# Altium PCB Daemi.PcbDoc (part 1 of 2)
Units mm, origin at the board's own origin, x right, y up, seen from the top; angles counter-clockwise.
Board outline 85 x 85 mm, 2 copper layers (Top Layer, Bottom Layer); 151 components, 56 nets, 527 pads, 120 vias.
Unrouted connection lines stored in the file: 9.
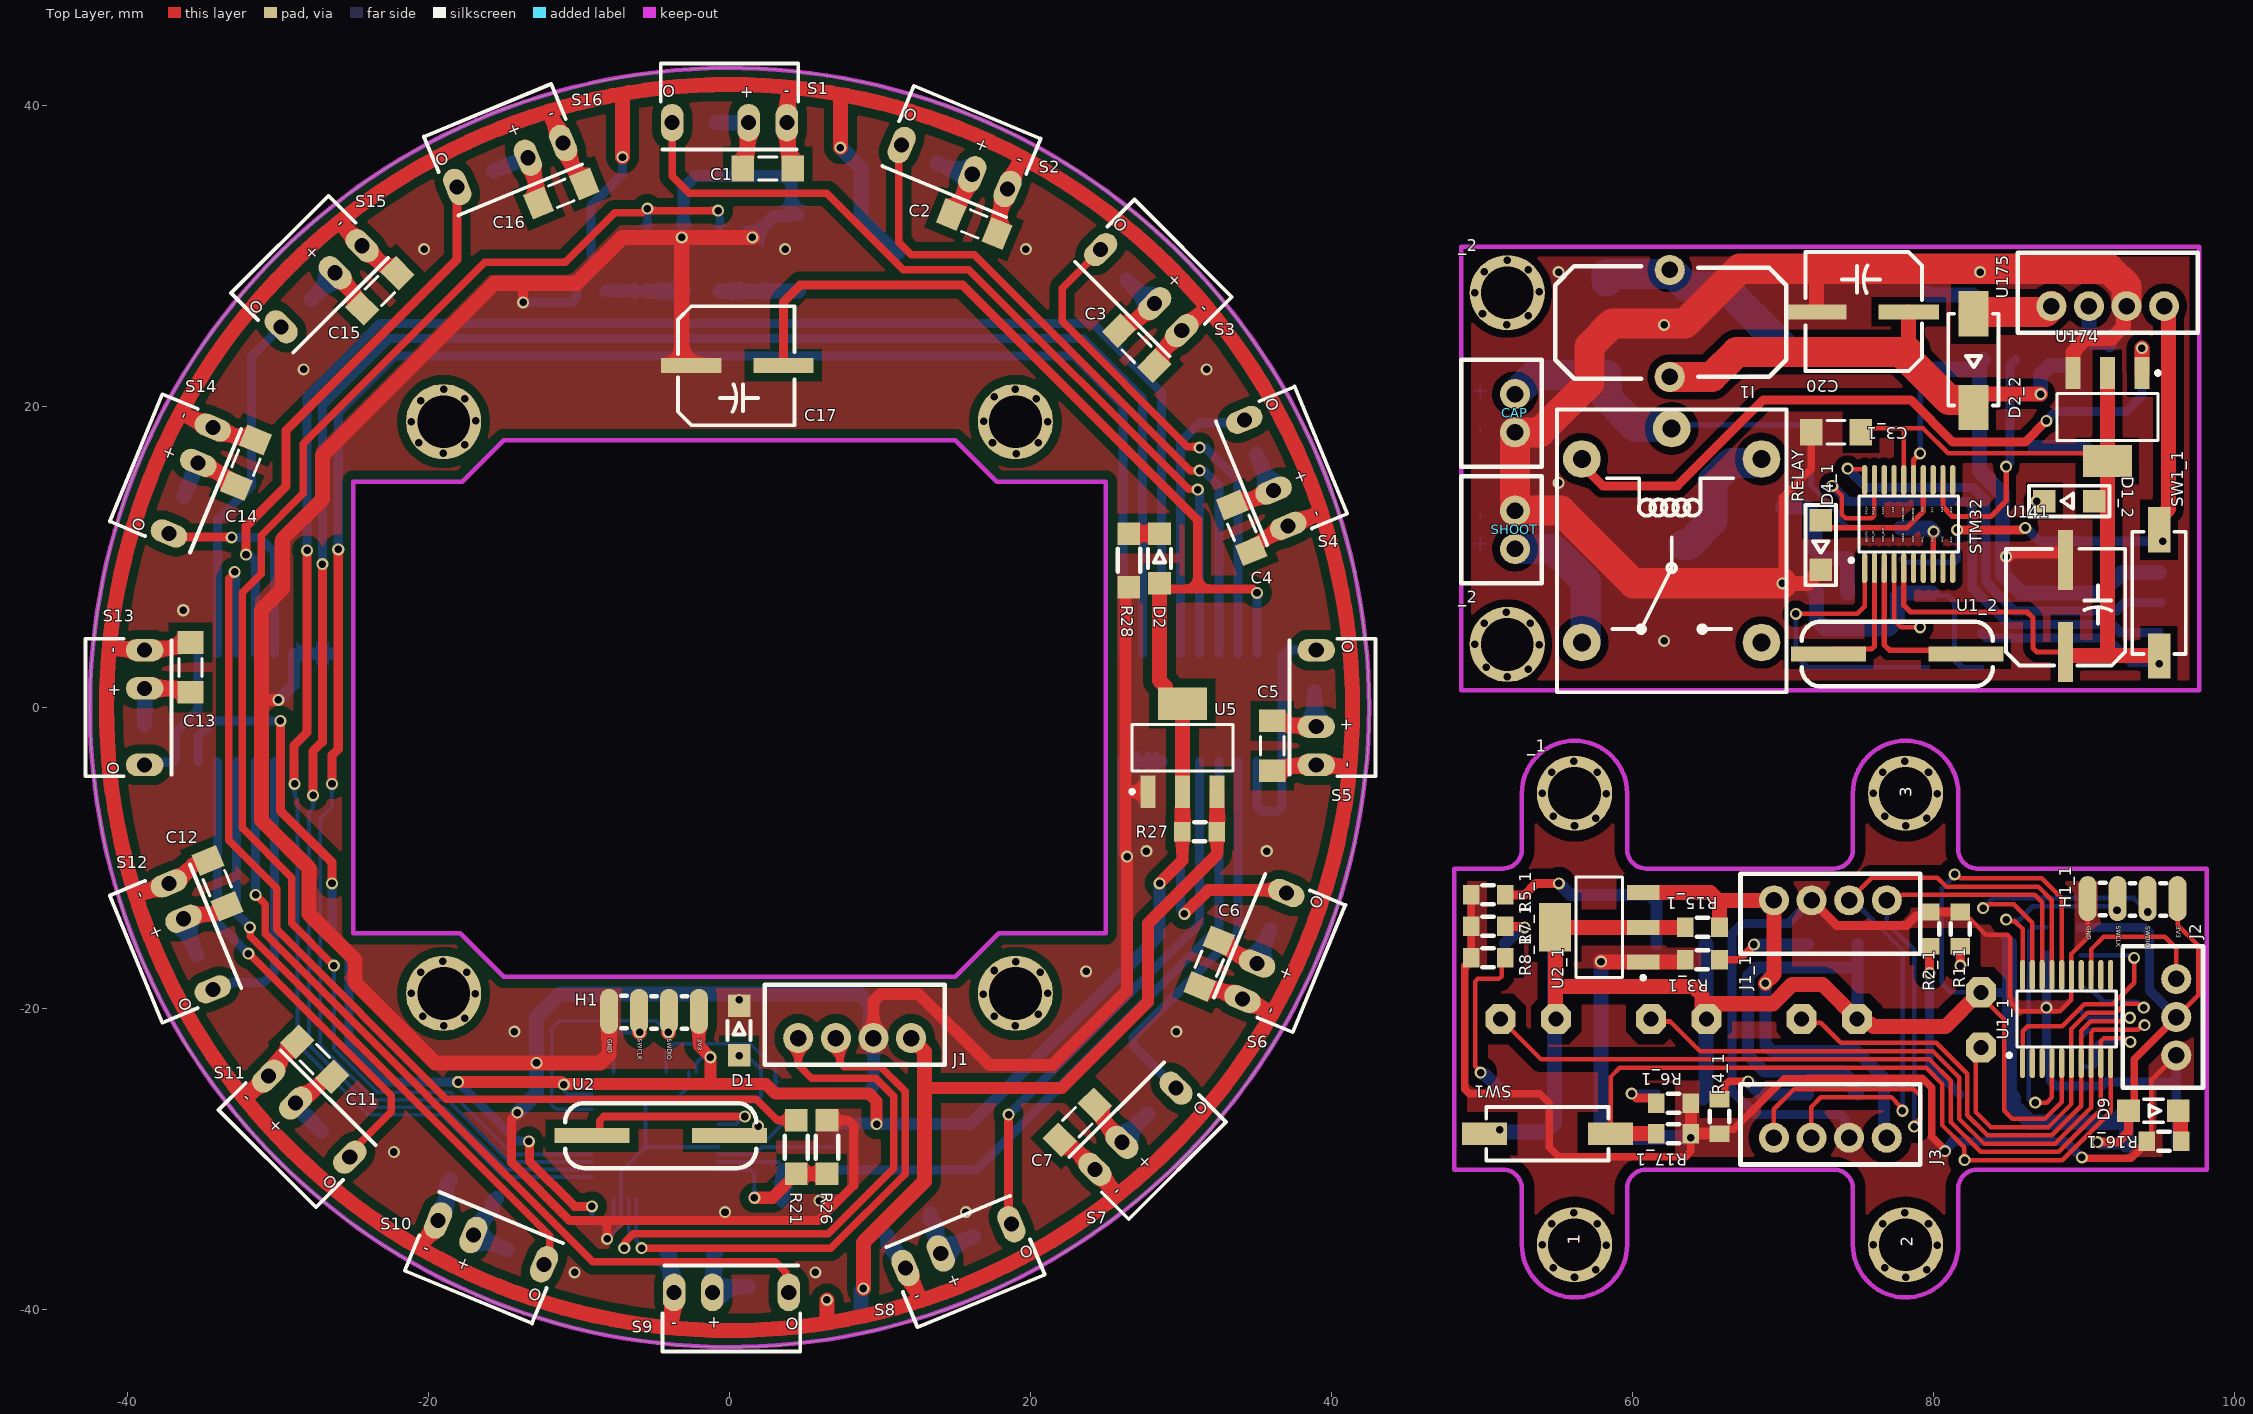
[diagram p0: Top Layer view]
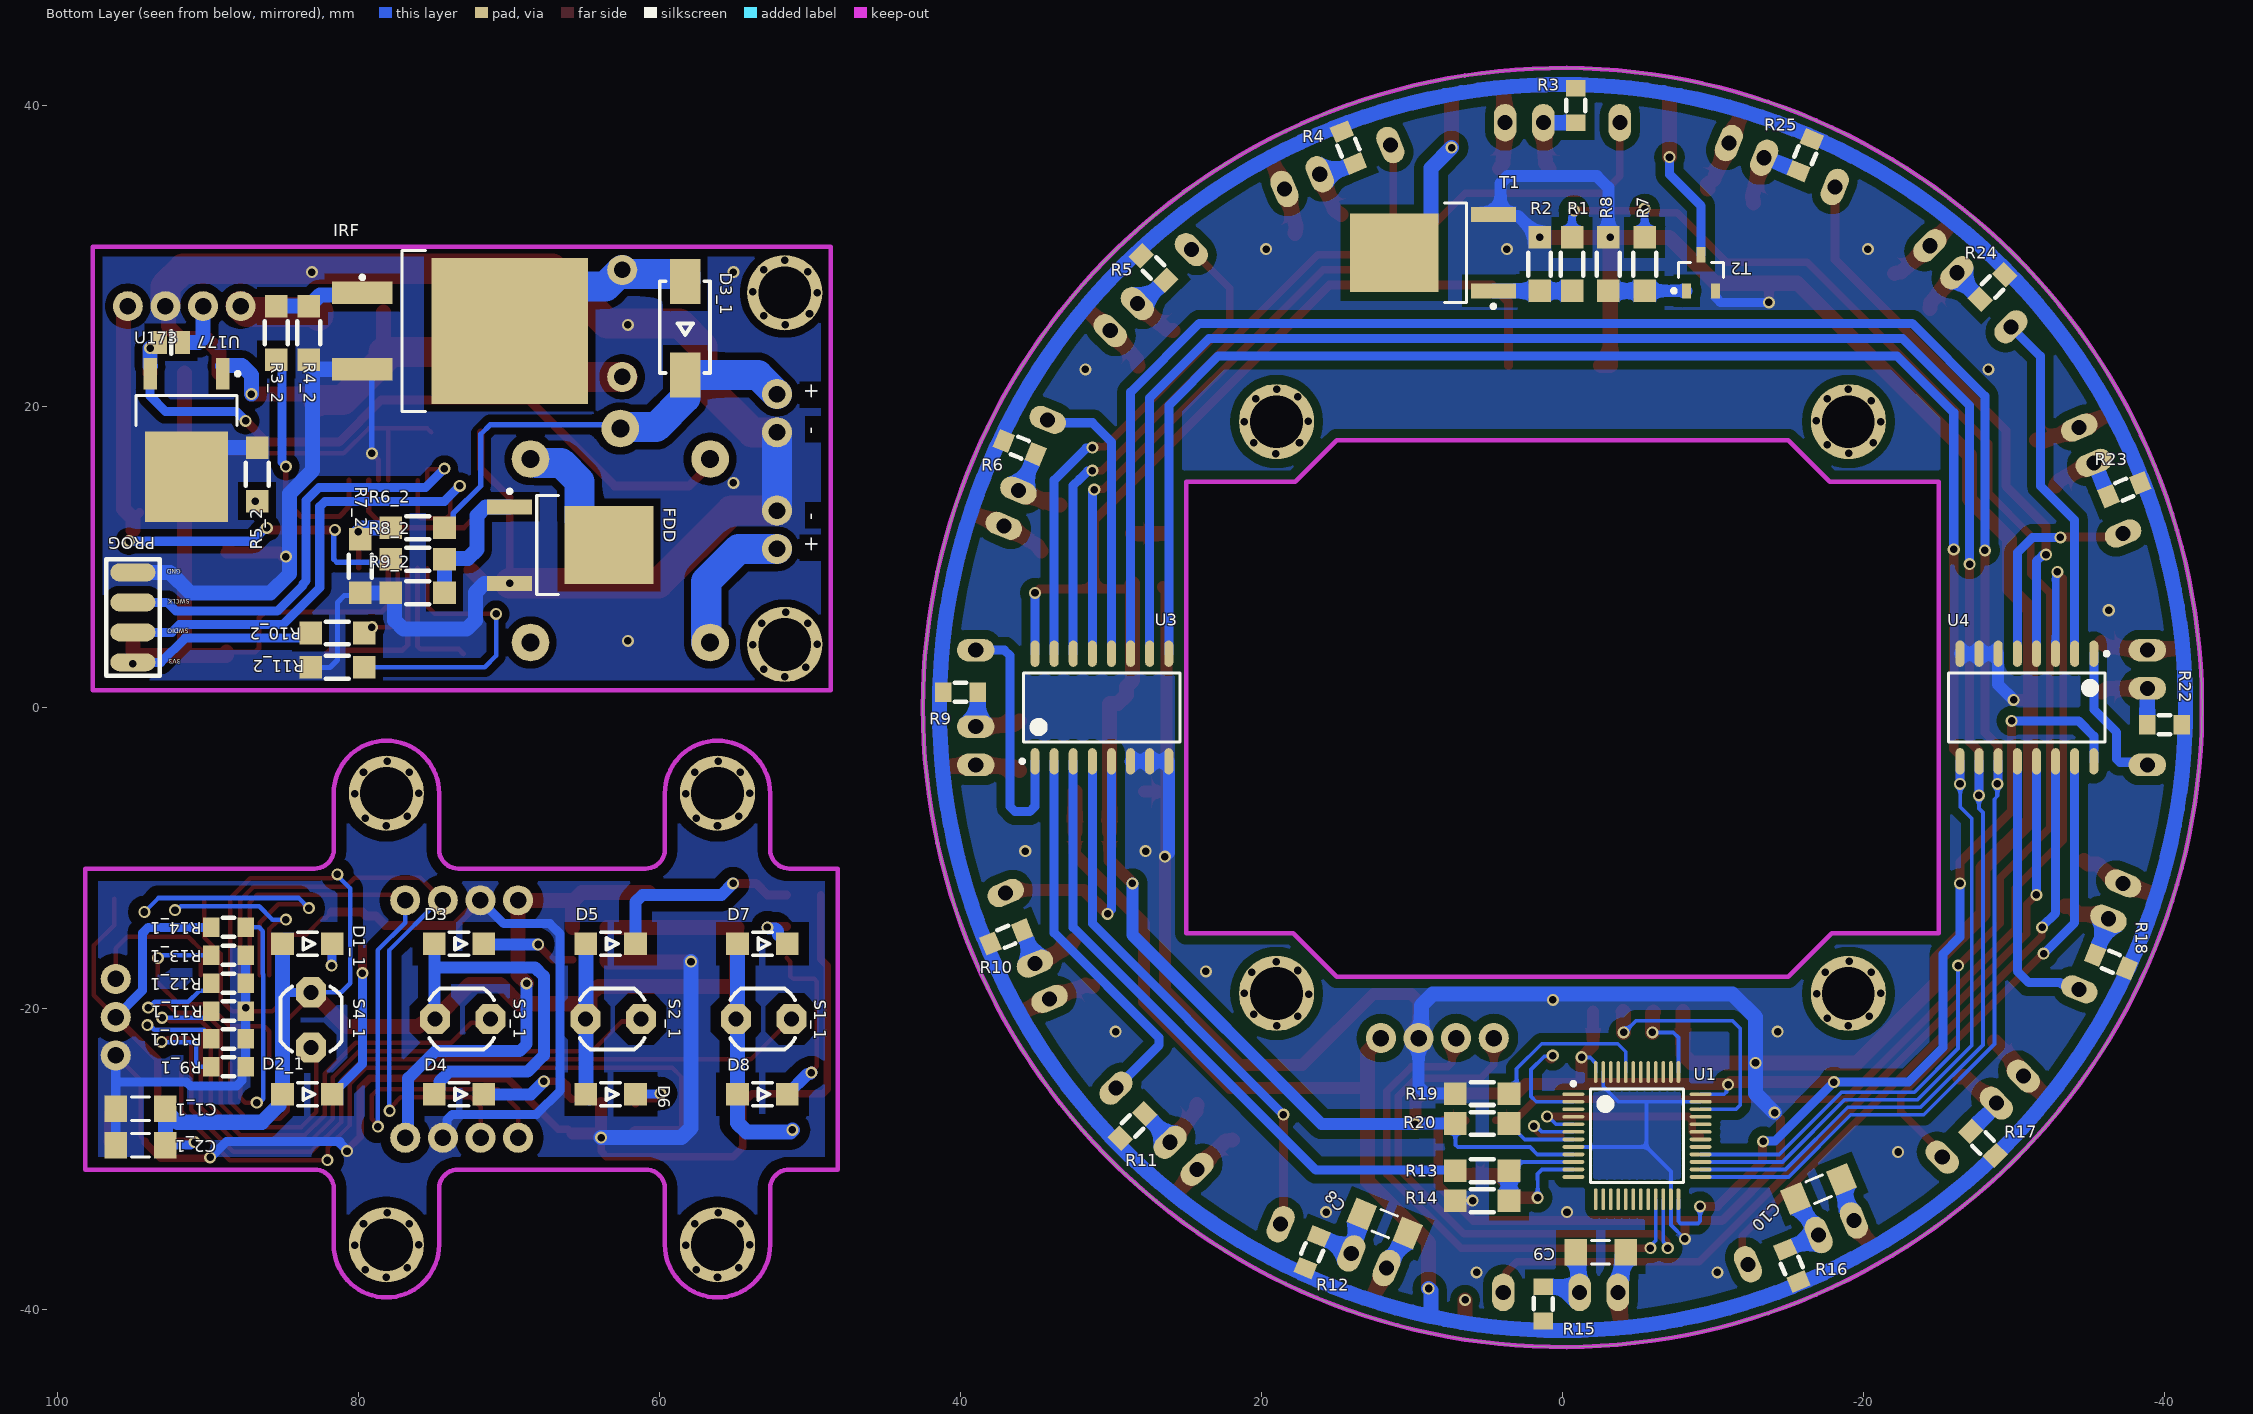
[diagram p1: Bottom Layer view, seen from below]

## Layer stack, top to bottom
Top Solder: solder mask 0.0102, Solder Resist, Dk 3.5
Top Layer: signal copper 0.0356
Dielectric 1: dielectric 0.32, FR-4, Dk 4.8
Bottom Layer: signal copper 0.0356
Bottom Solder: solder mask 0.0102, Solder Resist, Dk 3.5

## Board outline
-42.5,0 ccw(c0,0) 0,-42.5 ccw(c0,0) 42.5,0 ccw(c0,0) 0,42.5 ccw(c0,0)
cut-out: -25,-15 -25,15 -17.766,15 -15,17.766 15,17.766 17.766,15 25,15 25,-15 17.893,-15 15,-17.893 -15,-17.893 -17.893,-15

## Design rules (kind name [scope] priority, off if disabled: settings)
Clearance [All] p1: gap=0.6 ignorepadtopadclearanceinfootprint=FALSE except(0: Arc-Hole Track-Hole SMDPad-Hole THPad-Hole Via-Hole Fill-Hole Poly-Hole Region-Hole Text-Hole; 0.25: Arc-Arc Arc-Track Arc-SMDPad Arc-Via Track-Track Track-SMDPad Track-Via SMDPad-SMDPad SMDPad-Via THPad-Via Via-Via; 0.254: Arc-THPad Arc-Text Track-THPad Track-Text SMDPad-THPad SMDPad-Text THPad-THPad THPad-Text Via-Text Fill-Text Poly-Text Region-Text Text-Text)
PlaneConnect [All] p1: planeconnectstyle=Direct reliefexpansion=0.508 reliefentries=4 reliefconductorwidth=0.254 reliefairgap=0.254
PolygonConnect [All] p1: connectstyle=Direct reliefconductorwidth=0.254 reliefentries=4 polygonreliefangle="90 Angle" airgapwidth=0.254
RoutingVias [All] p1: holewidth=0.5 width=0.8 viastyle="Through Hole" minholewidth=0.5 minwidth=0.8 maxholewidth=0.6 maxwidth=1
SolderMaskExpansion [All] p1: expansion=0.102 istentingtop=FALSE
Width [All] p1: maxlimit=10 minlimit=0.25 preferedwidth=0.3
29 further rules are at their usual default settings.

## Classes and differential pairs
component class HS0038_BOARD: C1 C2 C3 C4 C5 C6 C7 C8 C9 C10 C11 C12 C13 C14 C15 C16 C17 D1 D2 H1 J1 R1 R2 R3 R4 R5 R6 R7 R8 R9 R10 R11 R12 R13 R14 R15 R16 R17 R18 R19 R20 R21 R22 R23 R24 R25 R26 R27 R28 S1 S2 S3 S4 S5 S6 S7 S8 S9 S10 S11 S12 S13 S14 S15 S16 T1 T2 U1 U2 U3 U4 U5

## Components (designator, comment, footprint, x,y, rotation, side; value= is the part's Value field where it differs from the comment)
1 "Comment" SCREW 56.152,-35.701 r90 top locked
2 "Comment" SCREW 78.152,-35.701 r90 top
3 "Comment" SCREW 78.152,-5.701 r90 top
_1 "Comment" SCREW 56.152,-5.701 r90 top locked
_2 "Comment" SCREW 51.689,4.191 r90 top
_2 "Comment" SCREW 51.689,27.559 r0 top
C1 "CAP" CAP1206 2.54,35.814 r0 top
C1_1 "CAP" CAP1206 94.488,-26.67 r180 bottom (schematic designator C1)
C2 "CAP" CAP1206 16.257,32.134 r337.5 top
C2_1 "CAP" CAP1206 94.488,-29.083 r180 bottom (schematic designator C2)
C3 "CAP" CAP1206 27.051,23.876 r315 top
C3_1 "Comment" CAP1206 73.533,18.288 r180 top
C4 "CAP" CAP1206 34.036,11.938 r292.5 top
C5 "CAP" CAP1206 36.068,-2.54 r270 top
C6 "CAP" CAP1206 31.877,-17.018 r247.5 top
C7 "CAP" CAP1206 23.114,-27.559 r225 top
C8 "CAP" CAP1206 11.811,-34.29 r202.5 bottom
C9 "CAP" CAP1206 -2.54,-36.195 r180 bottom
C10 "CAP" CAP1206 -17.018,-32.004 r157.5 bottom
C11 "CAP" CAP1206 -27.559,-23.368 r135 top
C12 "CAP" CAP1206 -34.033,-11.683 r112.5 top
C13 "CAP" CAP1206 -35.814,2.667 r90 top
C14 "CAP" CAP1206 -32.131,16.256 r67.5 top
C15 "CAP" CAP1206 -23.241,27.686 r45 top
C16 "CAP" CAP1206 -11.177,34.166 r22.5 top
C17 "CAP" "CAP SMD 100uF 16V" 0.508,22.733 r0 top
C20 "Comment" "CAP SMD 100uF 16V" 75.311,26.289 r180 top
CAP "Comment" "XH 2pin" 51.308,19.558 r90 top
D1 "LED" "LED GREEN 1206" 0.635,-21.463 r90 top
D1_1 "LED" "LED RED 1206" 83.406,-15.701 r180 bottom locked (schematic designator D1)
D1_2 "Comment" "LED BLUE 1206" 89.027,13.716 r180 top
D2 "LED" "LED GREEN 1206" 28.575,9.906 r90 top
D2_1 "LED" "LED RED 1206" 83.406,-25.701 r180 bottom locked (schematic designator D2)
D2_2 "Comment" Diode 82.677,23.114 r270 top
D3 "LED" "LED RED 1206" 73.328,-15.701 r180 bottom locked
D3_1 "Comment" Diode 58.293,25.273 r270 bottom
D4 "LED" "LED RED 1206" 73.328,-25.701 r180 bottom locked
D4_1 "Comment" "LED BLUE 1206" 72.517,10.795 r270 top
D5 "LED" "LED RED 1206" 63.249,-15.701 r180 bottom locked
D6 "LED" "LED RED 1206" 63.249,-25.701 r180 bottom locked
D7 "LED" "LED RED 1206" 53.171,-15.701 r180 bottom locked
D8 "LED" "LED RED 1206" 53.171,-25.701 r180 bottom locked
D9 "LED" "LED GREEN 1206" 94.615,-26.797 r0 top
FDD "Comment" FDD6690A 65.913,10.795 r180 bottom
H1 "PROG" PROGRAMER -5.08,-20.193 r180 top
H1_1 "PROG" PROGRAMER 93.176,-12.7 r180 top (schematic designator H1)
I1 "Comment" inductor 62.357,25.527 r90 top
IRF "Comment" IRF540S 73.106,25.019 r180 bottom
J1 "XH4" "XH 4PIN" 8.318,-21.082 r0 top
J1_1 "XH4" "XH 4PIN" 73.152,-13.701 r180 top locked (schematic designator J1)
J2 "XH3" "XH 3PIN" 95.25,-20.574 r90 top
J3 "XH4" "XH 4PIN" 73.152,-27.701 r0 top locked
PROG "Comment" PROGRAMER 94.996,6.054 r90 bottom
R1 "RES" RES1206 -0.635,29.464 r90 bottom
R1_1 "RES" RES805 81.788,-14.732 r270 top (schematic designator R1)
R2 "RES" RES1206 1.524,29.464 r90 bottom
R2_1 "RES" RES805 79.756,-14.732 r270 top (schematic designator R2)
R3 "RES" RES805 -0.889,40.005 r90 bottom
R3_1 "RES" RES805 64.643,-16.764 r0 top (schematic designator R3)
R3_2 "Comment" RES1206 85.471,24.892 r270 bottom
R4 "RES" RES805 14.224,37.211 r67.5 bottom
R4_1 "RES" RES805 65.786,-27.178 r90 top (schematic designator R4)
R4_2 "Comment" RES1206 83.315,24.892 r270 bottom
R5 "RES" RES805 27.178,29.21 r45 bottom
R5_1 "RES" RES805 50.419,-12.446 r0 top (schematic designator R5)
R5_2 "Comment" RES1206 86.741,15.494 r90 bottom
R6 "RES" RES805 36.068,17.272 r22.5 bottom
R6_1 "RES" RES805 62.738,-26.289 r180 top (schematic designator R6)
R6_2 "Comment" RES1206 76.073,11.938 r180 bottom
R7 "RES" RES1206 -5.461,29.464 r90 bottom
R7_1 "RES" RES805 50.419,-14.541 r0 top (schematic designator R7)
R7_2 "Comment" RES1206 79.883,9.398 r270 bottom
R8 "RES" RES1206 -3.048,29.464 r90 bottom
R8_1 "RES" RES805 50.419,-16.637 r0 top (schematic designator R8)
R8_2 "Comment" RES1206 76.073,9.865 r0 bottom
R9 "RES" RES805 40.005,1.016 r0 bottom
R9_1 "RES" RES805 88.646,-23.88 r0 bottom (schematic designator R9)
R9_2 "Comment" RES1206 76.073,7.62 r0 bottom
R10 "RES" RES805 36.957,-15.24 r337.5 bottom
R10_1 "RES" RES805 88.646,-22.025 r0 bottom (schematic designator R10)
R10_2 "Comment" RES1206 81.407,4.953 r0 bottom
R11 "RES" RES805 28.575,-27.813 r315 bottom
R11_1 "RES" RES805 88.646,-20.17 r0 bottom (schematic designator R11)
R11_2 "Comment" RES1206 81.407,2.666 r0 bottom
R12 "RES" RES805 16.637,-36.195 r292.5 bottom
R12_1 "RES" RES805 88.646,-18.315 r0 bottom (schematic designator R12)
R13 "RES" RES1206 5.334,-30.774 r0 bottom
R13_1 "RES" RES805 88.646,-16.46 r0 bottom (schematic designator R13)
R14 "RES" RES1206 5.334,-32.766 r180 bottom
R14_1 "RES" RES805 88.646,-14.605 r180 bottom (schematic designator R14)
R15 "RES" RES805 1.27,-39.624 r270 bottom
R15_1 "RES" RES805 64.643,-14.605 r180 top (schematic designator R15)
R16 "RES" RES805 -15.24,-37.084 r247.5 bottom
R16_1 "RES" RES805 95.323,-28.829 r0 top (schematic designator R16)
R17 "RES" RES805 -27.94,-28.956 r225 bottom
R17_1 "RES" RES805 62.738,-28.321 r180 top (schematic designator R17)
R18 "RES" RES805 -36.449,-16.891 r202.5 bottom
R19 "RES" RES1206 5.334,-25.654 r180 bottom
R20 "RES" RES1206 5.334,-27.644 r180 bottom
R21 "RES" RES1206 4.445,-29.21 r90 top
R22 "RES" RES805 -40.005,-1.143 r180 bottom
R23 "RES" RES805 -37.338,14.478 r157.5 bottom
R24 "RES" RES805 -28.575,27.94 r135 bottom
R25 "RES" RES805 -16.129,36.703 r112.5 bottom
R26 "RES" RES1206 6.477,-29.21 r270 top
R27 "RES" RES805 31.242,-8.255 r180 top
R28 "RES" RES1206 26.543,9.779 r270 top
RELAY "Comment" "Relay 5V 10A" 62.611,10.414 r90 top
S1 "TSOP1738" TSOP1738 0,38.608 r180 top
S1_1 "LDR" LDR 53.152,-20.701 r180 bottom locked (schematic designator S1)
S2 "TSOP1738" TSOP1738 14.859,35.687 r157.5 top
S2_1 "LDR" LDR 63.152,-20.701 r180 bottom locked (schematic designator S2)
S3 "TSOP1738" TSOP1738 27.178,27.559 r135 top
S3_1 "LDR" LDR 73.152,-20.701 r180 bottom (schematic designator S3)
S4 "TSOP1738" TSOP1738 35.433,15.494 r112.5 top
S4_1 "LDR" LDR 83.152,-20.701 r270 bottom locked (schematic designator S4)
S5 "TSOP1738" TSOP1738 38.735,0 r90 top
S6 "TSOP1738" TSOP1738 35.306,-15.748 r67.5 top
S7 "TSOP1738" TSOP1738 26.797,-27.813 r45 top
S8 "TSOP1738" TSOP1738 15.113,-35.56 r22.5 top
S9 "TSOP1738" TSOP1738 0.127,-38.608 r0 top
S10 "TSOP1738" TSOP1738 -15.748,-35.306 r337.5 top
S11 "TSOP1738" TSOP1738 -27.751,-27.007 r315 top
S12 "TSOP1738" TSOP1738 -35.56,-15.113 r292.5 top
S13 "TSOP1738" TSOP1738 -38.608,0 r270 top
S14 "TSOP1738" TSOP1738 -35.56,14.986 r247.5 top
S15 "TSOP1738" TSOP1738 -26.924,27.813 r225 top
S16 "TSOP1738" TSOP1738 -14.478,35.814 r202.5 top
SHOOT "Comment" "XH 2pin" 51.308,11.811 r90 top
STM32 "Comment" STM32F030F4P6 78.359,12.192 r90 top
SW1 "Switch" pushbutton 54.356,-28.321 r0 top
SW1_1 "Comment" pushbutton 94.996,7.62 r270 top
T1 "FDD" FDD6690A 8.636,30.226 r0 bottom
T2 "AO3400A" AO3400A -9.205,28.886 r90 bottom
U1 "STM32F103C8T6" STM32F103C8T6 -4.953,-28.448 r180 bottom
U1_1 "STM32F030F4P6" STM32F030F4P6 88.852,-20.701 r90 top locked (schematic designator U1)
U1_2 "Comment" "Crystal Oscilator" 77.597,3.556 r0 top
U2 "Oscilator" "Crystal Oscilator" -4.572,-28.448 r0 top
U2_1 "1117" AMS1117 57.785,-14.605 r180 top (schematic designator U2)
U3 "MUX8" "4051 SMD" 30.607,0 r90 bottom
U4 "MUX8" "4051 SMD" -30.861,0 r270 bottom
U5 "1117" AMS1117 30.099,-2.667 r90 top
U141 "Comment" "CAP SMD 100uF 16V" 88.773,6.731 r90 top
U173 "Comment" "7805 (SOT-252)" 91.44,17.78 r270 bottom
U174 "Comment" AMS1117 91.567,19.304 r270 top
U175 "Comment" "XH 4PIN" 91.59,27.559 r0 top
U177 "Comment" Jumper 92.456,24.257 r180 bottom
? "Comment" SCREW -19,-19 r90 top
? "Comment" SCREW 19,-19 r180 top
? "Comment" SCREW 19,19 r270 top
? "Comment" SCREW -19,19 r0 top

## Footprints (in the part's own frame and the unit in brackets; to place one, negate y for a bottom-side part, rotate by r counter-clockwise, add the part's x,y. Pads: shape width x height; smd on the part's side, far side on the other; paste and mask are expansions set on the pad)
"4051 SMD" [mm] "SOP, 16-Leads, Body 10.20x5.30mm, Pitch 1.27mm, IPC Medium Density"
  oval 1.75x0.6 smd: 1(-3.575,4.445) 2(-3.575,3.175) 3(-3.575,1.905) 4(-3.575,0.635) 5(-3.575,-0.635) 6(-3.575,-1.905) 7(-3.575,-3.175) 8(-3.575,-4.445) 9(3.575,-4.445) 10(3.575,-3.175) 11(3.575,-1.905) 12(3.575,-0.635) 13(3.575,0.635) 14(3.575,1.905) 15(3.575,3.175) 16(3.575,4.445)
  silkscreen extent -3.7,-5.2 2.3,5.42, body extent -3.9,-5.2 3.9,5.2, height 2
"7805 (SOT-252)" [mm] "D-PAK, 3-Pads, Body 6.25x6.71mm (max), IPC Medium Density"
  rect 2.1x0.9 smd: 1(-4.4,2.4) 3(-4.4,-2.4)
  rect 6x5.5 smd: 4(2.45,0)
  silkscreen extent -4.52,-3.35 -0.95,3.52, body extent -5.06,-3.35 4.85,3.35, height 2.45
AMS1117 [mm] "SOT223, 4-Leads, Body 6.30x7.00mm (avg), Pitch 2.30mm, IPC Medium Density"
  rect 2.15x1 smd: 1(-2.925,2.3) 2(-2.925,0) 3(-2.925,-2.3)
  rect 2.15x3.25 smd: 4(2.925,0)
  silkscreen extent -3.05,-3.35 1.55,3.47, body extent -3.5,-3.35 3.5,3.35, height 1.65
AO3400A [mm] "SOT23, 3-Leads, Body 2.90x2.45mm, Pitch 0.95mm, IPC Medium Density"
  rect 1x0.6 smd: 1(-1.2,0.95) 2(-1.2,-0.95) 3(1.2,0)
  silkscreen extent -1.32,-1.5 0.7,1.93, body extent -1.3,-1.5 1.3,1.5, height 1.1
CAP1206 [mm] "Chip Capacitor, 2-Leads, Body 3.20x1.60mm, IPC Medium Density"
  rect 1.5x1.75 smd: 1(-1.651,0) 2(1.651,0)
  silkscreen extent -0.6,-0.77 0.6,0.77, body extent -1.6,-0.8 1.6,0.8, height 1
"CAP SMD 100uF 16V" [mm]
  rect 4x1 smd: 1(-3.048,0) 2(3.07,0.003)
  silkscreen extent -3.94,-3.97 3.81,3.94, body extent -4.75,-4.15 4.75,4.15, height 10.51
"Crystal Oscilator" [mm]
  rect 5x1 smd: 1(-4.572,0) 2(4.572,0)
  silkscreen extent -6.35,-2.16 6.35,2.16, body extent -6.5,-2.35 6.5,2.35, height 4.21
Diode [mm]
  rect 3x2 smd: 1(-3.048,0) 2(3.175,0)
  silkscreen extent -3.06,-1.69 3.05,1.65, body extent -3.12,-1.78 3.12,1.78, height 2.26
FDD6690A [mm] "D-PAK, 3-Pads, Body 5.85x6.66mm (max), IPC Medium Density"
  rect 3x1 smd: 1(-4.05,2.54) 3(-4.05,-2.54)
  rect 5.9x5.2 smd: 4(2.55,0)
  silkscreen extent -4.18,-3.3 -0.8,3.69, body extent -5,-3.3 5,3.3, height 3.03
inductor [mm]
  round 2 hole 1.1: 1(-3.556,-0.127) 2(3.556,-0.127)
  silkscreen extent -3.68,-7.87 3.81,7.49, body extent -4.15,-8.42 4.15,8.17, height 16.29
IRF540S [mm] "D2-PAK, 3-Pads, Body 7.93x8.70mm (max), IPC Medium Density"
  rect 4x1.5 smd: 1(-6.65,2.54) 3(-6.65,-2.54)
  rect 10.4x9.7 smd: 4(3.15,0)
  silkscreen extent -6.78,-5.35 -2.45,5.35, body extent -7.65,-5.33 7.6,5.33, height 5.08
Jumper [mm]
  rect 1x1.5 smd: 1(-0.762,0) 2(0.762,0)
  silkscreen extent 0,-0.76 0,0.76
LDR [mm]
  oct 2x2 hole 1: 1(-1.778,0) 2(1.905,0)
  silkscreen extent -2.15,-2.03 2.15,2.03, body extent -2.5,-2.15 2.5,2.15, height 2.9
"LED BLUE 1206" [mm]
  rect 1.5x1.5 smd: 1(-1.651,0) 2(1.651,0)
  silkscreen extent -2.67,-1.02 2.67,1.02, body extent -1.61,-0.85 1.66,0.8, height 0.9
"LED GREEN 1206" [mm]
  rect 1.5x1.5 smd: 1(-1.651,0) 2(1.651,0)
  silkscreen extent -0.64,-0.76 0.64,0.76, body extent -1.63,-0.83 1.64,0.82, height 0.9
"LED RED 1206" [mm]
  rect 1.5x1.5 smd: 1(-1.651,0) 2(1.651,0)
  silkscreen extent -0.64,-0.76 0.64,0.76, body extent -1.63,-0.83 1.64,0.82, height 0.9
PROGRAMER [mm]
  oval 1.2x3 smd: 1(-3.048,0) 2(-1.058,0) 3(0.931,0) 4(2.921,0)
  silkscreen extent -2.29,-1.05 2.12,1.14
pushbutton [mm]
  rect 3x1.5 smd: 1(-4.191,0) 2(4.191,0)
  silkscreen extent -4.06,-1.78 4.06,1.78, body extent -4.17,-1.82 4.17,1.82, height 4.25
"Relay 5V 10A" [mm]
  round 2.5 hole 1.2: 1(-6.096,5.969) 2(-6.096,-5.969) 3(6.096,-5.969) 4(6.096,5.969) 5(8.128,0)
  silkscreen extent -9.4,-7.62 9.4,7.62, body extent -9.6,-7.8 9.6,7.8, height 15.9
RES805 [mm]
  rect 1.1x1.3 smd: 1(-1.143,0) 2(1.143,0)
  silkscreen extent -0.39,-0.64 0.38,0.64, body extent -1,-0.6 1,0.6, height 0.48
RES1206 [mm]
  rect 1.5x1.5 smd: 1(-1.778,0) 2(1.778,0)
  silkscreen extent -0.76,-0.76 0.76,0.76, body extent -1.58,-0.82 1.58,0.82, height 0.53
SCREW [mm]
  round 5 hole 3.5: 1(0,0)
  round 0 hole 0.5: ""(-2.159,0) ""(-1.651,-1.397) ""(-1.524,1.397) ""(-0.031,-2.11) ""(0,2.159) ""(1.397,1.524) ""(1.397,-1.524) ""(2.128,0.059)
STM32F030F4P6 [mm] "TSOP, 20-Leads, Body 6.50x4.40mm, Pitch 0.65mm, IPC Medium Density"
  oval 2x0.35 smd: 1(-2.925,2.925) 2(-2.925,2.275) 3(-2.925,1.625) 4(-2.925,0.975) 5(-2.925,0.325) 6(-2.925,-0.325) 7(-2.925,-0.975) 8(-2.925,-1.625) 9(-2.925,-2.275) 10(-2.925,-2.925) 11(2.925,-2.925) 12(2.925,-2.275) 13(2.925,-1.625) 14(2.925,-0.975) 15(2.925,-0.325) 16(2.925,0.325) 17(2.925,0.975) 18(2.925,1.625) 19(2.925,2.275) 20(2.925,2.925)
  silkscreen extent -2.54,-3.3 1.85,3.93, body extent -3.15,-3.3 3.15,3.3, height 1.2
STM32F103C8T6 [mm] "TSQFP, 48-Leads, Body 7.00x7.00mm, Pitch 0.50mm, IPC Medium Density"
  oval 1.45x0.25 smd: 1(-4.225,2.75) 2(-4.225,2.25) 3(-4.225,1.75) 4(-4.225,1.25) 5(-4.225,0.75) 6(-4.225,0.25) 7(-4.225,-0.25) 8(-4.225,-0.75) 9(-4.225,-1.25) 10(-4.225,-1.75) 11(-4.225,-2.25) 12(-4.225,-2.75) 25(4.225,-2.75) 26(4.225,-2.25) 27(4.225,-1.75) 28(4.225,-1.25) 29(4.225,-0.75) 30(4.225,-0.25) 31(4.225,0.25) 32(4.225,0.75) 33(4.225,1.25) 34(4.225,1.75) 35(4.225,2.25) 36(4.225,2.752)
  oval 0.25x1.45 smd: 13(-2.75,-4.225) 14(-2.25,-4.225) 15(-1.75,-4.225) 16(-1.25,-4.225) 17(-0.75,-4.225) 18(-0.25,-4.225) 19(0.25,-4.225) 20(0.75,-4.225) 21(1.25,-4.225) 22(1.75,-4.225) 23(2.25,-4.225) 24(2.75,-4.225) 37(2.75,4.225) 38(2.25,4.225) 39(1.75,4.225) 40(1.25,4.225) 41(0.75,4.225) 42(0.25,4.225) 43(-0.25,4.225) 44(-0.75,4.225) 45(-1.25,4.225) 46(-1.75,4.225) 47(-2.25,4.225) 48(-2.75,4.225)
  silkscreen extent -4.35,-3.1 3.1,3.57, body extent -4.5,-4.5 4.5,4.5, height 1.6
TSOP1738 [mm]
  oval 1.5x2.5 hole 1: 1(-3.81,-0.254) 2(-1.27,-0.254) 3(3.81,-0.254)
  silkscreen extent -4.57,-4.19 4.57,1.52, body extent -5,-4.4 5,1.4, height 13.5
"XH 2pin" [mm]
  round 2 hole 1.1: 1(-1.27,-0.889) 2(1.27,-0.889)
  silkscreen extent -3.56,-2.67 3.56,2.67, body extent -3.7,-2.88 3.7,2.88, height 7
"XH 3PIN" [mm]
  round 2 hole 1.1: 1(-2.54,-0.889) 2(0,-0.889) 3(2.54,-0.889)
  silkscreen extent -4.7,-2.67 4.7,2.67, body extent -4.95,-2.88 4.95,2.88, height 7
"XH 4PIN" [mm]
  round 2 hole 1.1: 1(-3.753,-0.889) 2(-1.253,-0.889) 3(1.247,-0.889) 4(3.747,-0.889)
  silkscreen extent -5.97,-2.67 5.97,2.67, body extent -6.2,-2.88 6.2,2.88, height 7

## Part data
C1 C1_1 C2 C2_1 C3 C4 C5 C6 C7 C8 C9 C10 C11 C12 C13 C14 C15 C16: library part CAP1206, "Capacitor SMD 1206"
C17: library part "CAP Electrolit SMD", "Capacitor Electrolit SMD"
D1 D1_1 D2 D2_1 D3 D4 D5 D6 D7 D8 D9: library part "LED SMD 1206", "LED SMD 1206"
H1 H1_1: library part Programmer
J1 J1_1 J3: library part "XH 4PIN", "XH Connector 4pins"
J2: library part "XH 3PIN", "XH Connector 3pins"
R1 R2 R7 R8 R13 R14 R19 R20 R21 R26 R28: library part RES1206, "RESISTOR SMD"
R1_1 R2_1 R3 R3_1 R4 R4_1 R5 R5_1 R6 R6_1 R7_1 R8_1 R9 R9_1 R10 R10_1 R11 R11_1 R12 R12_1 R13_1 R14_1 R15 R15_1 R16 R16_1 R17 R17_1 R18 R22 R23 R24 R25 R27: library part RES805, "RESISTOR SMD"
S1 S2 S3 S4 S5 S6 S7 S8 S9 S10 S11 S12 S13 S14 S15 S16: "IR SENSOR"
S1_1 S2_1 S3_1 S4_1: "Light Emmiting Diode - photocell"
SW1: library part pushbutton, "Switch SMD Tact"
T1: library part FDD6690A, "FDD6690A MOSFET N-Chanel"
U1: "STM32F103C8T6 / LQFP48"
U2: library part Crystal, "Crystal Oscilator 8MHz"
U2_1 U5: library part AMS1117, "3.3v Regulator"
U3 U4: library part 4051, "MULTIPLEXER 8 BIT"

## Via types
v1: diameter 0.8, hole 0.5, Top Layer to Bottom Layer, tented both sides, 120 vias

## Nets (pads, with @x,y where several pads share a name; then routed paths per layer and width w, separated by ;. In a path a pad name is that pad's centre, name@x,y a point inside that pad or via, vN(x,y) a via of type N, cw(c..) or ccw(c..) an arc to the next point about the centre after c; other vN are vias at no path point)
+5: J1.4 R3.2 R4.2 R5.2 R6.2 R9.2 R10.2 R11.2 R12.2 R15.2 R16.2 R17.2 R18.2 R22.2 R23.2 R24.2 R25.2 R27.1 U5.3 | length 314.8
  Top Layer w0.8: J1.4@12.065,-21.971 12.256,-22.162 12.945,-22.851 ; 12.945,-25.273 22.098,-25.273 27.813,-19.558 27.813,-14.351 32.399,-9.765 R27.1@32.399,-8.241
  Top Layer w1: v1(8.89,-38.608) 8.89,-35.56 12.945,-31.505 12.945,-25.273 12.945,-22.851 J1.4@12.256,-22.162 ; R27.1@32.385,-8.255 32.399,-8.241 U5.3@32.399,-5.592
  Bottom Layer w1: 8.752,-40.464 8.752,-38.746 v1(8.89,-38.608) ; 41.4,0 ccw(c0,0) 41.4,0
A: U1.27 U3.9 U4.9 | length 136.9
  Top Layer w0.6: v1(-26.416,-5.08) -26.416,-3.175 -26,-2.759 v1(-26,10.506)
  Bottom Layer w0.25: v1(-26.416,-5.08) -26.429,-5.093 -26.429,-6.617 -27.194,-7.382 -27.194,-22.463 -23.59,-26.067 -18.747,-26.067 -14.616,-30.198 U1.27@-9.178,-30.198
  Bottom Layer w0.6: v1(-26.416,-5.08) U4.9@-26.416,-3.575 ; v1(-26,10.506) -26,19.593 -22.225,23.368 22.86,23.368 26.162,20.066 U3.9@26.162,3.575
ADC0: R13.1 R14.2 U1.10 | length 6
  Bottom Layer w0.25: U1.10@-0.728,-30.198 R13.1@3.261,-30.198
  Bottom Layer w1: R14.2@3.556,-32.766 R13.1@3.556,-30.774
ADC1: R21.1 R26.2 U1.11 | length 9.6
  Top Layer w0.8: v1(1.651,-32.578) 2.855,-32.578 R21.1@4.445,-30.988 R26.2@6.477,-30.988
  Bottom Layer w0.25: U1.11@-0.728,-30.698 1.361,-30.698 1.662,-30.999 1.662,-31.358 1.651,-31.369 v1(1.651,-32.578)
B: U1.26 U3.10 U4.10 | length 142.3
  Top Layer w0.6: v1(-27.673,-5.842) -27.686,-5.829 -27.686,-2.921 -27.051,-2.286 v1(-27.051,9.525)
  Bottom Layer w0.25: v1(-27.673,-5.842) -27.673,-6.718 -27.94,-6.985 -27.94,-22.424 -23.797,-26.567 -18.954,-26.567 -14.823,-30.698 U1.26@-9.178,-30.698
  Bottom Layer w0.6: U4.10@-27.686,-3.575 -27.686,-5.829 v1(-27.673,-5.842) ; v1(-27.051,9.525) -27.051,20.066 -22.606,24.511 23.495,24.511 27.432,20.574 U3.10@27.432,3.575
BOOT0: R19.2 U1.44 | length 11.4
  Bottom Layer w0.25: U1.44@-4.203,-24.223 -4.203,-22.872 -3.67,-22.339 1.384,-22.339 3.048,-24.003 3.048,-25.146 R19.2@3.556,-25.654
C: U1.25 U3.11 U4.11 | length 146.3
  Top Layer w0.6: v1(-28.895,-5.08) -28.933,-5.042 -28.933,-2.517 -28.07,-1.654 v1(-28.07,10.44)
  Bottom Layer w0.25: v1(-28.895,-5.08) -28.895,-5.903 -28.702,-6.096 -28.702,-22.369 -24.004,-27.067 -19.161,-27.067 -15.03,-31.198 U1.25@-9.178,-31.198
  Bottom Layer w0.6: U4.11@-28.956,-3.575 -28.956,-4.369 -28.933,-4.392 -28.933,-5.042 v1(-28.895,-5.08) ; v1(-28.07,10.44) -28.07,20.698 -23.241,25.527 24.13,25.527 28.702,20.955 U3.11@28.702,3.575
GND: C17.1 D1.2 H1.4 J1.3 R2.2 R8.2 R14.1 R19.1 R26.1 R28.2 T1.3 T2.2 U1.8 U1.23 U1.35 U1.47 U3.6 U3.7 U3.8 U4.6 U4.7 U4.8 U5.1 | length 294.6
  Top Layer w0.6: v1(-14.097,-26.924) -14.097,-26.978 -14.478,-27.359 -14.478,-30.226 -10.607,-34.097 -8.408,-34.097 ; v1(-13.716,26.924) -13.716,28.194 ; v1(-8.128,-35.306) -8.128,-34.163 -8.342,-34.163 -8.408,-34.097 ; v1(5.969,-32.766) 6.096,-32.766 6.667,-33.337 ; R26.1@6.477,-27.432 7.904,-27.432 8.255,-27.783 8.255,-31.75 6.667,-33.337 ; -8.408,-34.097 5.908,-34.097 6.667,-33.337
  Top Layer w0.8: -31.115,0.508 v1(-29.972,0.508) ; J1.3@9.565,-21.971 9.565,-19.519 10.034,-19.05 12.573,-19.05 17.272,-23.749 21.463,-23.749 26.416,-18.796 v1(26.416,-9.906) 26.299,-9.789 26.299,-5.715 ; R28.2@26.543,8.001 26.299,7.757 26.299,-5.715 ; U5.1@27.799,-5.592 26.422,-5.592 26.299,-5.715
  Top Layer w1: H1.4@-8.001,-20.193 -8.001,-23.036 -8.587,-23.622 v1(-12.827,-23.622) -19.558,-23.622 -24.892,-18.288 -24.892,-16.764 -27.94,-13.716 -27.94,-10.668 -31.115,-7.493 -31.115,0.508 -31.115,6.477 -29.718,7.874 -29.718,11.176 -27.051,13.843 -27.051,16.764 -15.621,28.194 -13.716,28.194 -10.16,28.194 -7.112,31.242 v1(-3.175,31.242) ; C17.1@-2.54,22.733 -3.175,22.733 v1(-3.175,31.242) ; v1(1.524,31.242) v1(-3.175,31.242)
  Bottom Layer w0.25: U1.35@-9.178,-26.198 -5.461,-26.198 ; v1(-8.128,-35.306) -7.203,-34.381 -7.203,-30.825 -5.576,-29.198 ; U1.47@-2.703,-24.223 -2.703,-25.182 -3.719,-26.198 -5.461,-26.198 ; U1.8@-0.728,-29.198 -5.576,-29.198 ; -5.576,-29.198 -5.576,-26.313 -5.461,-26.198
  Bottom Layer w0.6: v1(-13.716,26.924) -10.506,26.924 -10.155,27.275 T2.2@-10.155,27.686 ; v1(5.969,-32.766) R14.1@7.112,-32.766
  Bottom Layer w0.8: v1(-29.972,0.508) -28.956,1.524 U4.6@-28.956,3.575 U4.7@-27.686,3.575 U4.8@-26.416,3.575 ; R8.2@-3.048,31.242 -3.048,34.544 -2.286,35.306 3.649,35.306 4.117,34.837 4.117,32.866 4.217,32.766 T1.3@4.586,32.766 ; v1(1.524,31.242) 2.948,32.666 T1.3@4.117,32.666 ; R19.1@7.112,-25.654 9.096,-25.654 9.565,-25.185 J1.3@9.565,-21.971 ; v1(26.416,-9.906) 26.162,-9.652 U3.8@26.162,-3.575 U3.7@27.432,-3.575 U3.6@28.702,-3.575
  Bottom Layer w1: v1(-14.097,-26.924) -12.827,-25.654 -12.827,-20.574 -11.303,-19.05 0.635,-19.05 8.636,-19.05 9.374,-19.788 9.374,-21.78 J1.3@9.565,-21.971
  other v1: -10.3,-37.537 5.7,-37.537 -0.3,-33.537 15.7,-33.537 -22.3,-29.537 -14.3,-21.537 29.7,-21.537 0.635,-19.431 23.7,-17.537 27.7,-9.537 35.7,-9.537 62.102,4.431 -36.3,6.463 55.102,14.931 -28.3,22.463 31.7,22.463 62.102,25.431 55.102,28.931 83.102,28.931 -20.3,30.463 3.7,30.463 19.7,30.463
NetC1_1: C1.1 R3.1 S1.2 | length 5.3
  Top Layer w1: C1.1@0.889,35.814 1.139,36.189 1.27,38.362 S1.2@1.27,38.862
  Bottom Layer w1: R3.1@-0.889,38.862 S1.2@1.27,38.862
NetC2_1: C2.1 R4.1 S2.2 | length 5.7
  Top Layer w1: C2.1@14.732,32.766 15.106,33.017 15.938,34.974 S2.2@16.13,35.436
  Bottom Layer w1: R4.1@13.787,36.155 13.931,36.111 16.046,35.234 S2.2@16.13,35.436
NetC3_1: C3.1 R5.1 S3.2 | length 5.7
  Top Layer w1: C3.1@25.884,25.043 26.326,25.132 27.902,26.487 S3.2@28.256,26.841
  Bottom Layer w1: R5.1@26.37,28.402 26.486,28.306 28.103,26.688 S3.2@28.256,26.841
NetC4_1: C4.1 R6.1 S4.2 | length 5.7
  Top Layer w1: C4.1@33.404,13.463 33.816,13.449 35.692,14.227 S4.2@36.154,14.418
  Bottom Layer w1: R6.1@35.012,16.835 35.076,16.699 36.04,14.371 S4.2@36.154,14.418
NetC5_1: C5.1 R9.1 S5.2 | length 5.4
  Top Layer w1: C5.1@36.068,-0.889 36.443,-1.139 38.489,-1.27 S5.2@38.989,-1.27
  Bottom Layer w1: R9.1@38.862,1.016 38.87,0.866 38.87,-1.27 S5.2@38.989,-1.27
NetC6_1: C6.1 R10.1 S6.2 | length 5.5
  Top Layer w1: C6.1@32.509,-15.493 32.76,-15.867 34.593,-16.827 S6.2@35.055,-17.019
  Bottom Layer w1: S6.2@35.055,-17.019 34.997,-16.995 35.847,-14.943 R10.1@35.901,-14.803
NetC7_1: C7.1 R11.1 S7.2 | length 5.8
  Top Layer w1: C7.1@24.281,-26.392 24.37,-26.834 25.725,-28.537 S7.2@26.079,-28.891
  Bottom Layer w1: S7.2@26.079,-28.891 25.986,-28.798 27.667,-27.117 R11.1@27.767,-27.005
NetC8_1: C8.1 R12.1 S8.2 | length 6.1
  Top Layer w1: S8.2@13.846,-35.819 S8.2@14.037,-36.281
  Bottom Layer w1: C8.1@13.336,-33.658 13.336,-34.007 13.75,-34.421 13.75,-35.994 S8.2@14.037,-36.281 13.955,-36.084 16.066,-35.209 R12.1@16.2,-35.139
NetC9_1: C9.1 R15.1 S9.2 | length 5.6
  Top Layer w1: S9.2@-1.143,-38.862 S9.2@-1.143,-38.362
  Bottom Layer w1: S9.2@-1.143,-38.862 -1.047,-38.766 S9.2@-1.047,-38.505 ; C9.1@-0.889,-36.195 -1.047,-36.353 S9.2@-1.047,-38.505 ; R15.1@1.27,-38.481 1.12,-38.505 S9.2@-1.047,-38.505
NetC10_1: C10.1 R16.1 S10.2 | length 5.9
  Top Layer w1: S10.2@-17.019,-35.055 S10.2@-17.019,-34.649
  Bottom Layer w1: C10.1@-15.493,-32.636 -15.739,-32.882 -15.739,-33.37 -17.019,-34.649 S10.2@-17.019,-35.055 -17.037,-35.099 -14.94,-35.968 R16.1@-14.803,-36.028
NetC11_1: C11.1 R17.1 S11.2 | length 5.8
  Top Layer w1: S11.2@-28.829,-26.289 -28.38,-25.84 -28.049,-25.84 -26.745,-24.535 C11.1@-26.392,-24.535
  Bottom Layer w1: S11.2@-28.829,-26.289 -28.905,-26.365 -27.233,-28.037 R17.1@-27.132,-28.148
NetC12_1: C12.1 R18.1 S12.2 | length 5.9
  Top Layer w1: S12.2@-36.281,-14.037 -35.994,-13.75 -34.292,-13.75 -33.75,-13.208 C12.1@-33.401,-13.208
  Bottom Layer w1: S12.2@-36.281,-14.037 -36.372,-14.075 -35.445,-16.313 R18.1@-35.393,-16.454
NetC13_1: C13.1 R22.1 S13.2 | length 5.5
  Top Layer w1: S13.2@-38.862,1.27 -38.362,1.27 -36.189,1.266 C13.1@-35.814,1.016
  Bottom Layer w1: R22.1@-38.862,-1.143 S13.2@-38.862,1.27
NetC14_1: C14.1 R23.1 S14.2 | length 5.5
  Top Layer w1: S14.2@-35.309,16.257 -34.847,16.065 -33.014,15.105 C14.1@-32.763,14.731
  Bottom Layer w1: R23.1@-36.282,14.041 -36.222,14.178 -35.353,16.275 S14.2@-35.309,16.257
NetC15_1: C15.1 R24.1 S15.2 | length 5.5
  Top Layer w1: S15.2@-26.206,28.891 -25.852,28.537 -24.497,26.961 C15.1@-24.408,26.519
  Bottom Layer w1: R24.1@-27.767,27.132 -27.667,27.244 -26.113,28.798 S15.2@-26.206,28.891
NetC16_1: C16.1 R25.1 S16.2 | length 5.6
  Top Layer w1: S16.2@-13.402,36.535 -13.211,36.073 -12.615,33.977 C16.1@-12.703,33.534
  Bottom Layer w1: R25.1@-15.692,35.647 -15.552,35.701 -13.422,36.583 S16.2@-13.402,36.535
NetD1_1: D1.1 U1.2 | length 6.8
  Top Layer w0.8: v1(0.648,-23.127) D1.1@0.773,-23.252
  Bottom Layer w0.25: U1.2@-0.728,-26.198 1.742,-26.198 2.084,-25.856 2.084,-24.055 1.2,-23.171 0.692,-23.171 v1(0.648,-23.127)
NetD2_2: D2.2 R28.1 | length 2
  Top Layer w1: R28.1@26.543,11.557 D2.2@28.575,11.557
NetR1_1: R1.1 R2.1 T1.1 | length 5.2
  Bottom Layer w1: R1.1@-0.635,27.686 R2.1@1.524,27.686 T1.1@4.586,27.686
NetR7_1: R7.1 R8.1 T2.1 | length 5.2
  Bottom Layer w0.8: T2.1@-8.255,27.686 R7.1@-5.461,27.686
  Bottom Layer w1: R7.1@-5.461,27.686 R8.1@-3.048,27.686
NetR13_2: R13.2 U3.3 | length 43.3
  Bottom Layer w0.6: R13.2@6.889,-30.734 16.383,-30.734 32.512,-14.605 U3.3@32.512,-3.575
NetR21_2: R21.2 U4.3 | length 70.5
  Top Layer w0.5: v1(-32.893,9.017) -32.893,8.955 -33.274,8.574 -33.274,-8.825 -30.099,-12 -30.099,-14.749 -18.824,-26.024 1.767,-26.024 3.175,-27.432 R21.2@4.445,-27.432
  Bottom Layer w0.5: v1(-32.893,9.017) -32.836,8.96 -32.836,8.747 -32.766,8.678 U4.3@-32.766,3.575
NetU1_5: U1.5 U2.1 | length 13.1
  Top Layer w0.5: U2.1@-9.144,-28.448 -8.886,-28.448 -8.636,-28.198 -8.636,-27.471 -8.343,-27.178 v1(1.016,-27.178)
  Bottom Layer w0.25: U1.5@-0.728,-27.698 0.44,-27.698 0.96,-27.178 v1(1.016,-27.178)
NetU1_6: U1.6 U2.2 | length 5.1
  Top Layer w0.25: U2.2@0,-28.448 1.53,-28.448 1.905,-28.073 v1(1.905,-27.813)
  Bottom Layer w0.25: U1.6@-0.728,-28.198 1.371,-28.198 1.756,-27.813 v1(1.905,-27.813)
NRST: R20.2 U1.7 | length 4.7
  Bottom Layer w0.25: U1.7@-0.728,-28.698 2.502,-28.698 R20.2@3.556,-27.644
S0: S1.3 U3.13 | length 58.1
  Top Layer w0.5: S1.3@-3.81,38.862 -3.81,35.306 -2.667,34.163 6.477,34.163 11.557,29.083 15.913,29.083 30.503,14.493 31.1,14.493 v1(31.115,14.478)
  Bottom Layer w0.6: v1(31.115,14.478) 31.115,14.424 31.242,14.297 U3.13@31.242,3.575
S1: S2.3 U3.14 | length 45.7
  Top Layer w0.5: S2.3@11.436,37.38 11.245,37.188 11.245,30.919 12.065,30.099 16.256,30.099 30.607,15.748 v1(31.242,15.748)
  Bottom Layer w0.6: v1(31.242,15.748) 31.28,15.71 31.558,15.71 32.088,15.18 32.512,14.755 U3.14@32.512,3.575
S2: S3.3 U3.15 | length 33.4
  Top Layer w0.5: S3.3@24.664,30.433 22.098,27.867 22.098,25.654 30.423,17.329 31.185,17.329 v1(31.242,17.272)
  Bottom Layer w0.6: v1(31.242,17.272) 31.28,17.234 31.661,17.234 33.782,15.113 U3.15@33.782,3.575
S3: S4.3 U3.12 | length 18.9
  Bottom Layer w0.6: U3.12@29.972,3.575 29.972,17.653 31.242,18.923 34.021,18.923 S4.3@34.21,19.111
S4: S5.3 U3.1 | length 17.4
  Bottom Layer w0.6: U3.1@35.052,-3.575 35.052,-6.565 35.403,-6.916 36.378,-6.916 36.729,-6.565 36.729,3.459 37.081,3.81 S5.3@38.989,3.81
S5: S6.3 U3.5 | length 17.8
  Top Layer w0.8: v1(30.226,-13.716) 31.808,-12.134 36.807,-12.134 S6.3@36.999,-12.325
  Bottom Layer w0.6: U3.5@29.972,-3.575 29.972,-13.408 30.226,-13.662 v1(30.226,-13.716)
S6: S7.3 U3.2 | length 25.8
  Bottom Layer w0.6: S7.3@29.671,-25.299 26.813,-22.441 26.813,-21.944 33.782,-14.974 U3.2@33.782,-3.575